# Altium PCB PCB2.PcbDoc
Units mm, origin at the board's own origin, x right, y up, seen from the top; angles counter-clockwise.
Board outline 152.4 x 101.6 mm, 2 copper layers (Top Layer, Bottom Layer); 59 components, 44 nets, 191 pads, 9 vias.
Unrouted connection lines stored in the file: 1.
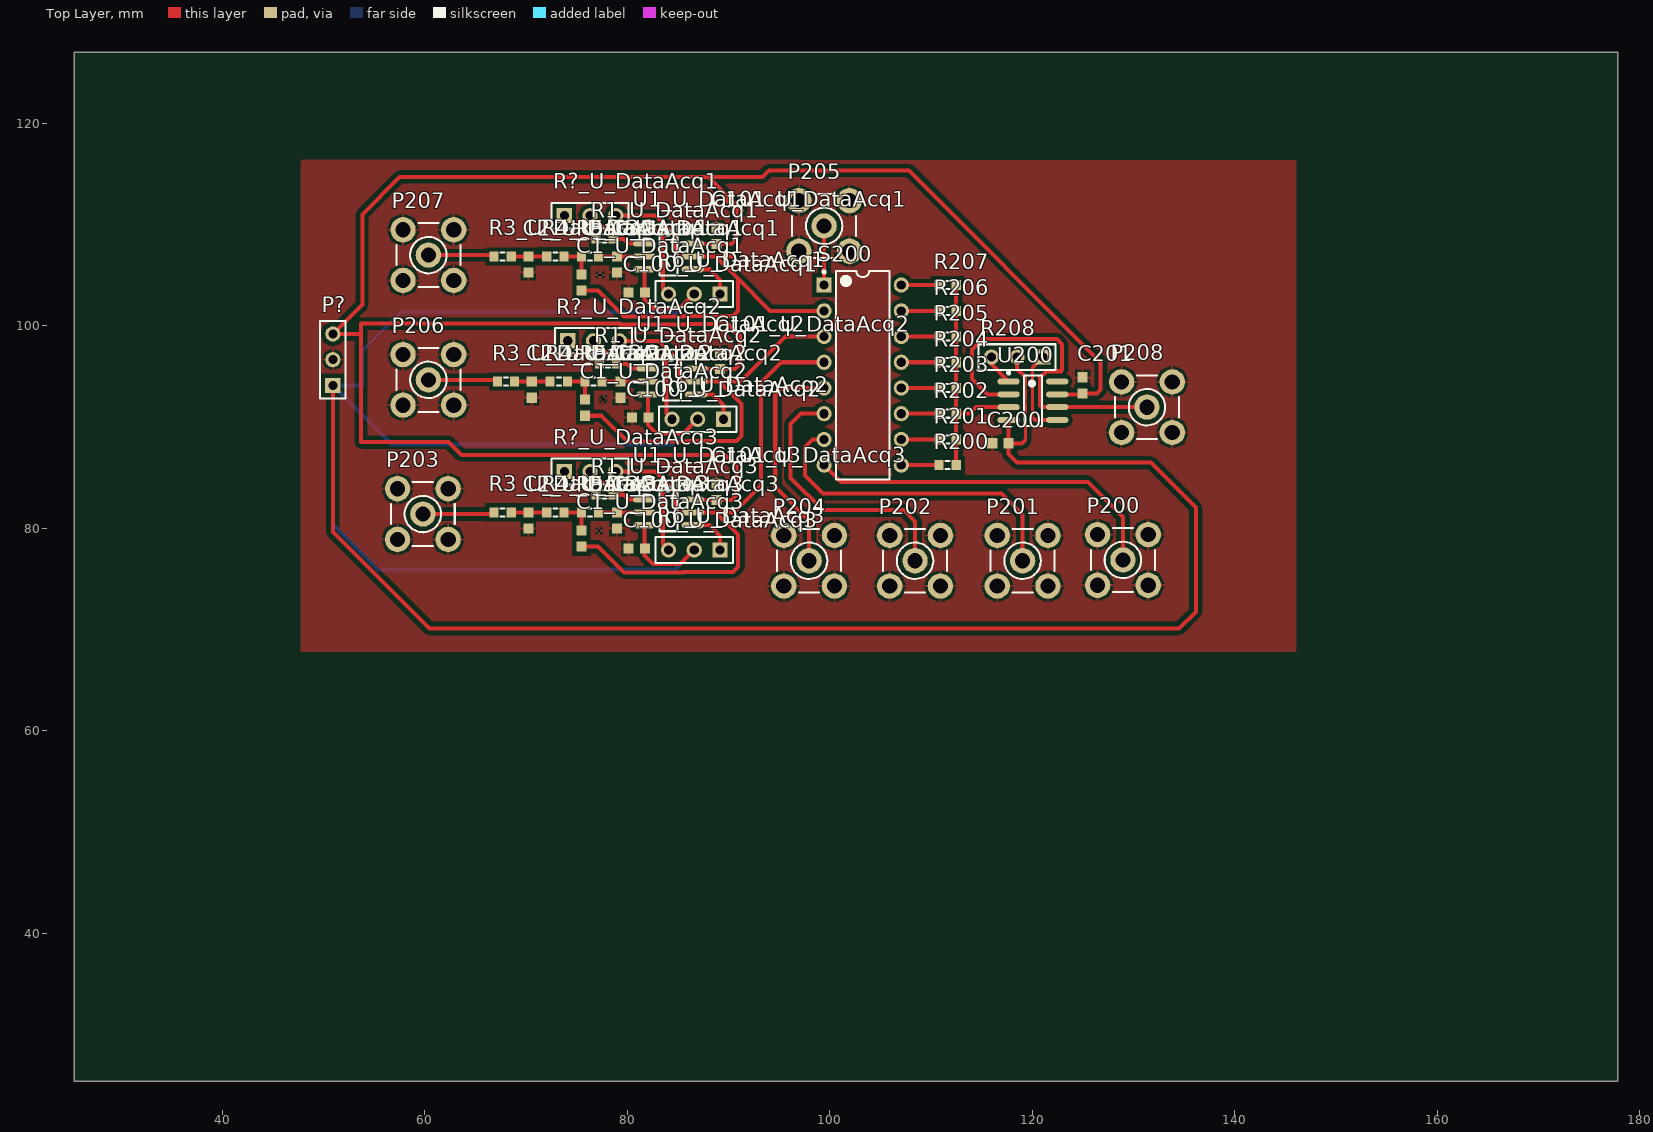
[diagram p0: Top Layer view]
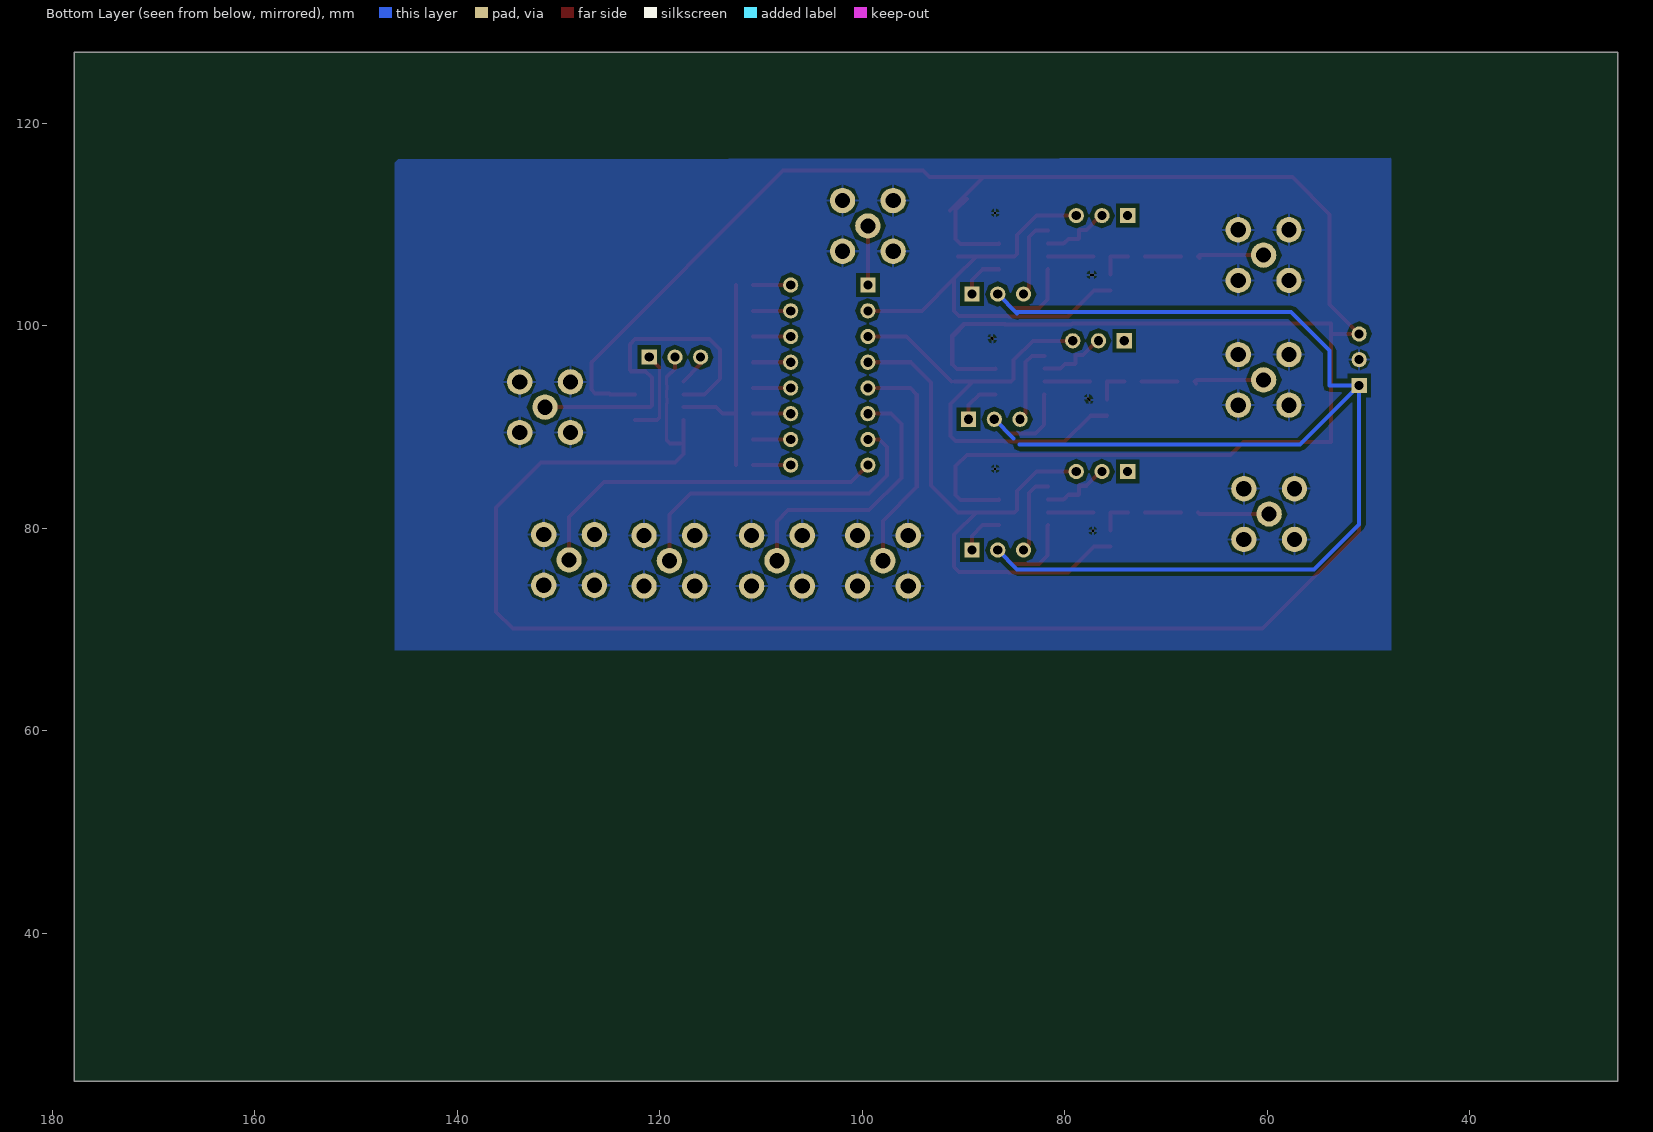
[diagram p1: Bottom Layer view, seen from below]

## Layer stack, top to bottom
Top Solder: solder mask 0.0102, Solder Resist, Dk 3.5
Top Layer: signal copper 0.0356
Dielectric 1: dielectric 0.32, FR-4, Dk 4.8
Bottom Layer: signal copper 0.0356
Bottom Solder: solder mask 0.0102, Solder Resist, Dk 3.5

## Board outline
25.4,25.4 177.8,25.4 177.8,127 25.4,127

## Design rules (kind name [scope] priority, off if disabled: settings)
Clearance [All] p1: gap=0.4 ignorepadtopadclearanceinfootprint=FALSE
PolygonConnect [All] p1: connectstyle=Relief reliefconductorwidth=0.254 reliefentries=4 polygonreliefangle="90 Angle" airgapwidth=0.254
RoomDefinition U_DataAcq1 [InComponentClass('U_DataAcq1')] p1: confinementstyle=ConfineIn formatcopy=TRUE lockcomponents=FALSE outline 65.278,100.076 92.075,100.076 92.075,112.903 65.278,112.903
RoomDefinition U_DataAcq3 [InComponentClass('U_DataAcq3')] p2: confinementstyle=ConfineIn formatcopy=TRUE lockcomponents=FALSE outline 65.278,74.803 92.075,74.803 92.075,87.63 65.278,87.63
RoomDefinition U_DataAcq2 [InComponentClass('U_DataAcq2')] p3: confinementstyle=ConfineIn formatcopy=TRUE lockcomponents=FALSE outline 65.62,87.719 92.417,87.719 92.417,100.546 65.62,100.546
RoutingVias [All] p1: holewidth=0.711 width=1.27 viastyle="Through Hole" minholewidth=0.711 minwidth=1.27 maxholewidth=0.711 maxwidth=1.27
SolderMaskExpansion [All] p1: expansion=0.102
Width [All] p1: maxlimit=0.6 minlimit=0.3 preferedwidth=0.4
30 further rules are at their usual default settings.

## Classes and differential pairs
channel class LPF: U_DataAcq1 U_DataAcq2 U_DataAcq3
net class out[1..3]: out1 out2 out3
net class in[1..3]: in1 in2 in3
component class WholeAdder: C200 C201 P200 P201 P202 P203 P204 P205 P206 P207 P208 P? R200 R201 R202 R203 R204 R205 R206 R207 R208 S200 U200
component class U_DataAcq3: C1_U_DataAcq3 C2_U_DataAcq3 C3_U_DataAcq3 C100_U_DataAcq3 C101_U_DataAcq3 R1_U_DataAcq3 R3_U_DataAcq3 R4_U_DataAcq3 R5_U_DataAcq3 R6_U_DataAcq3 R?_U_DataAcq3 U1_U_DataAcq3
component class U_DataAcq2: C1_U_DataAcq2 C2_U_DataAcq2 C3_U_DataAcq2 C100_U_DataAcq2 C101_U_DataAcq2 R1_U_DataAcq2 R3_U_DataAcq2 R4_U_DataAcq2 R5_U_DataAcq2 R6_U_DataAcq2 R?_U_DataAcq2 U1_U_DataAcq2
component class U_DataAcq1: C1_U_DataAcq1 C2_U_DataAcq1 C3_U_DataAcq1 C100_U_DataAcq1 C101_U_DataAcq1 R1_U_DataAcq1 R3_U_DataAcq1 R4_U_DataAcq1 R5_U_DataAcq1 R6_U_DataAcq1 R?_U_DataAcq1 U1_U_DataAcq1

## Components (designator, comment, footprint, x,y, rotation, side; value= is the part's Value field where it differs from the comment)
C1_U_DataAcq1 "Cap" CAPC1608N 75.477,104.267 r90 top value=100pF (schematic designator C1)
C1_U_DataAcq2 "Cap" CAPC1608N 75.819,91.91 r90 top value=100pF (schematic designator C1)
C1_U_DataAcq3 "Cap" CAPC1608N 75.477,78.994 r90 top value=100pF (schematic designator C1)
C2_U_DataAcq1 "Cap" CAPC1608N 70.231,106.045 r90 top value=100pF (schematic designator C2)
C2_U_DataAcq2 "Cap" CAPC1608N 70.573,93.688 r90 top value=100pF (schematic designator C2)
C2_U_DataAcq3 "Cap" CAPC1608N 70.231,80.772 r90 top value=100pF (schematic designator C2)
C3_U_DataAcq1 "Cap" CAPC1608N 78.994,106.045 r90 top value=100pF (schematic designator C3)
C3_U_DataAcq2 "Cap" CAPC1608N 79.336,93.688 r90 top value=100pF (schematic designator C3)
C3_U_DataAcq3 "Cap" CAPC1608N 78.994,80.772 r90 top value=100pF (schematic designator C3)
C100_U_DataAcq1 "Cap" CAPC1608N 80.938,103.289 r0 top value=100pF (schematic designator C100)
C100_U_DataAcq2 "Cap" CAPC1608N 81.28,90.932 r0 top value=100pF (schematic designator C100)
C100_U_DataAcq3 "Cap" CAPC1608N 80.938,78.016 r0 top value=100pF (schematic designator C100)
C101_U_DataAcq1 "Cap" CAPC1608N 88.812,108.877 r270 top value=100pF (schematic designator C101)
C101_U_DataAcq2 "Cap" CAPC1608N 89.154,96.52 r270 top value=100pF (schematic designator C101)
C101_U_DataAcq3 "Cap" CAPC1608N 88.812,83.604 r270 top value=100pF (schematic designator C101)
C200 "Cap" CAPC1608N 116.84,88.392 r0 top value=100pF
C201 "Cap" CAPC1608N 124.968,94.107 r270 top value=100pF
P200 "SMB" SMB_V-RJ45 128.945,76.875 r0 top
P201 "SMB" SMB_V-RJ45 119.039,76.795 r0 top
P202 "SMB" SMB_V-RJ45 108.418,76.795 r0 top
P203 "SMB" SMB_V-RJ45 59.817,81.407 r0 top
P204 "SMB" SMB_V-RJ45 97.957,76.795 r0 top
P205 "SMB" SMB_V-RJ45 99.441,109.855 r0 top
P206 "SMB" SMB_V-RJ45 60.365,94.655 r0 top
P207 "SMB" SMB_V-RJ45 60.365,106.974 r0 top
P208 "SMB" SMB_V-RJ45 131.318,91.959 r0 top
P? "Header 3" HDR1X3 50.927,94.107 r90 top
R1_U_DataAcq1 "Res1" RESC1608N 77.763,108.623 r0 top value=1K (schematic designator R1)
R1_U_DataAcq2 "Res1" RESC1608N 78.105,96.266 r0 top value=1K (schematic designator R1)
R1_U_DataAcq3 "Res1" RESC1608N 77.763,83.35 r0 top value=1K (schematic designator R1)
R3_U_DataAcq1 "Res1" RESC1608N 67.691,106.845 r0 top value=1K (schematic designator R3)
R3_U_DataAcq2 "Res1" RESC1608N 68.033,94.488 r0 top value=1K (schematic designator R3)
R3_U_DataAcq3 "Res1" RESC1608N 67.691,81.572 r0 top value=1K (schematic designator R3)
R4_U_DataAcq1 "Res1" RESC1608N 72.898,106.845 r0 top value=1K (schematic designator R4)
R4_U_DataAcq2 "Res1" RESC1608N 73.24,94.488 r0 top value=1K (schematic designator R4)
R4_U_DataAcq3 "Res1" RESC1608N 72.898,81.572 r0 top value=1K (schematic designator R4)
R5_U_DataAcq1 "Res1" RESC1608N 76.327,106.845 r0 top value=1K (schematic designator R5)
R5_U_DataAcq2 "Res1" RESC1608N 76.669,94.488 r0 top value=1K (schematic designator R5)
R5_U_DataAcq3 "Res1" RESC1608N 76.327,81.572 r0 top value=1K (schematic designator R5)
R6_U_DataAcq1 "Res Tap" HDR1X3 89.154,103.124 r180 top value=1K (schematic designator R6)
R6_U_DataAcq2 "Res Tap" HDR1X3 89.496,90.767 r180 top value=1K (schematic designator R6)
R6_U_DataAcq3 "Res Tap" HDR1X3 89.154,77.851 r180 top value=1K (schematic designator R6)
R200 "Res1" RESC1608N 111.633,86.233 r0 top value=1K
R201 "Res1" RESC1608N 111.633,88.773 r0 top value=1K
R202 "Res1" RESC1608N 111.633,91.313 r0 top value=1K
R203 "Res1" RESC1608N 111.633,93.853 r0 top value=1K
R204 "Res1" RESC1608N 111.633,96.393 r0 top value=1K
R205 "Res1" RESC1608N 111.633,98.933 r0 top value=1K
R206 "Res1" RESC1608N 111.633,101.473 r0 top value=1K
R207 "Res1" RESC1608N 111.633,104.013 r0 top value=1K
R208 "Res Tap" HDR1X3 121.031,96.901 r180 top value=1K
R?_U_DataAcq1 "Res Tap" HDR1X3 73.787,110.871 r0 top value=1K (schematic designator R?)
R?_U_DataAcq2 "Res Tap" HDR1X3 74.129,98.514 r0 top value=1K (schematic designator R?)
R?_U_DataAcq3 "Res Tap" HDR1X3 73.787,85.598 r0 top value=1K (schematic designator R?)
S200 "SW DIP-8" DIP-16 103.251,95.123 r0 top
U1_U_DataAcq1 "TL081BCD" TI-D8_N 84.074,107.48 r0 top (schematic designator U1)
U1_U_DataAcq2 "TL081BCD" TI-D8_N 84.416,95.123 r0 top (schematic designator U1)
U1_U_DataAcq3 "TL081BCD" TI-D8_N 84.074,82.207 r0 top (schematic designator U1)
U200 "TL081BCD" TI-D8_N 120.055,92.594 r0 top

## Footprints (in the part's own frame and the unit in brackets; to place one, negate y for a bottom-side part, rotate by r counter-clockwise, add the part's x,y. Pads: shape width x height; smd on the part's side, far side on the other; paste and mask are expansions set on the pad)
CAPC1608N [mm] "Chip Capacitor, Body 1.6x0.8mm, IPC Medium Density"
  rect 1x1 smd: 1(-0.8,0) 2(0.8,0)
  body extent -0.87,-0.48 0.87,0.48, height 0.85
DIP-16 [mm] "DIP; 16 Leads; Row Spacing 7.62 mm; Pitch 2.54 mm"
  rect 1.5x1.5 hole 0.9: 1(-3.81,8.89)
  round 1.5 hole 0.9: 2(-3.81,6.35) 3(-3.81,3.81) 4(-3.81,1.27) 5(-3.81,-1.27) 6(-3.81,-3.81) 7(-3.81,-6.35) 8(-3.81,-8.89) 9(3.81,-8.89) 10(3.81,-6.35) 11(3.81,-3.81) 12(3.81,-1.27) 13(3.81,1.27) 14(3.81,3.81) 15(3.81,6.35) 16(3.81,8.89)
  silkscreen extent -3.93,-10.3 2.65,10.31, body extent -3.6,-10.28 3.6,10.28, height 5.08
HDR1X3 [mm] "Connector; Header; 3 Position"
  rect 1.5x1.5 hole 0.9: 1(0,0)
  round 1.5 hole 0.9: 2(2.54,0) 3(5.08,0)
  silkscreen extent -1.27,-1.27 6.35,1.27
RESC1608N [mm] "Chip Resistor, Body 1.6x0.8mm, IPC Medium Density"
  rect 0.9x1 smd: 1(-0.85,0) 2(0.85,0)
  silkscreen extent -0.2,-0.4 0.2,0.4, body extent -0.85,-0.48 0.85,0.48, height 0.6
SMB_V-RJ45 [mm] "Connector; SMB Straight"
  round 2.5 hole 1.5: 1(0,0) 2(-2.5,-2.5) 2(-2.5,2.5) 2(2.5,-2.5) 2(2.5,2.5)
  silkscreen extent -3.15,-3.15 3.15,3.15
TI-D8_N [mm] "SOIC, 8-Leads, Body 4.9x3.9mm, Pitch 1.27mm, IPC Medium Density"
  oval 2.2x0.6 smd: 1(-2.4,1.905) 2(-2.4,0.635) 3(-2.4,-0.635) 4(-2.4,-1.905) 5(2.4,-1.905) 6(2.4,-0.635) 7(2.4,0.635) 8(2.4,1.905)
  silkscreen extent -2.52,-2.5 0.9,2.88, body extent -2,-2.5 2,2.5, height 1.75

## Part data
C1_U_DataAcq1 C1_U_DataAcq2 C1_U_DataAcq3 C2_U_DataAcq1 C2_U_DataAcq2 C2_U_DataAcq3 C3_U_DataAcq1 C3_U_DataAcq2 C3_U_DataAcq3 C100_U_DataAcq1 C100_U_DataAcq2 C100_U_DataAcq3 C101_U_DataAcq1 C101_U_DataAcq2 C101_U_DataAcq3 C200 C201: "Capacitor", LatestRevisionDate=17-Jul-2002, LatestRevisionNote="Re-released for DXP Platform.", PackageDescription="Radial Cap, Thru-Hole; 2 Leads; 0.3 in Pin Spacing", PackageReference=RAD-0.3, Published=8-Jun-2000, Publisher="Altium Limited"
P200 P201 P202 P203 P204 P205 P206 P207 P208: "SMB Straight Connector", LatestRevisionDate=17-Jul-2002, LatestRevisionNote="Re-released for DXP Platform.", Publisher="Altium Limited"
P?: "Header, 3-Pin", LatestRevisionDate=17-Jul-2002, LatestRevisionNote="Re-released for DXP Platform.", Publisher="Altium Limited"
R1_U_DataAcq1 R1_U_DataAcq2 R1_U_DataAcq3 R3_U_DataAcq1 R3_U_DataAcq2 R3_U_DataAcq3 R4_U_DataAcq1 R4_U_DataAcq2 R4_U_DataAcq3 R5_U_DataAcq1 R5_U_DataAcq2 R5_U_DataAcq3 R200 R201 R202 R203 R204 R205 R206 R207: "Resistor", LatestRevisionDate=17-Jul-2002, LatestRevisionNote="Re-released for DXP Platform.", PackageDescription="Axial Device, Thru-Hole; 2 Leads; 0.3 in Pin Spacing", PackageReference=AXIAL-0.3, Published=8-Jun-2000, Publisher="Altium Limited"
R6_U_DataAcq1 R6_U_DataAcq2 R6_U_DataAcq3 R208 R?_U_DataAcq1 R?_U_DataAcq2 R?_U_DataAcq3: "Tapped Resistor", LatestRevisionDate=17-Jul-2002, LatestRevisionNote="Re-released for DXP Platform.", PackageDescription="Variable Resistor, Thru-Hole; 3 Leads", PackageReference=VR3, Published=24-Mar-1999, Publisher="Altium Limited", Set Position=0.5, Sim Note="Enter the Resistance value and the set point into parameter fields."
S200: "DIP Switch, 8 Position, SPST", LatestRevisionDate=17-Jul-2002, LatestRevisionNote="Re-released for DXP Platform.", PackageDescription="DIP Switch; 16 Leads", PackageReference=DIP_SW_8WAY_SMD, Published=24-Mar-1999, Publisher="Altium Limited"
U1_U_DataAcq1 U1_U_DataAcq2 U1_U_DataAcq3 U200: "JFET-Input Operational Amplifier, 7 to 36 V, 0 to 70 degC, 8-pin SOIC (D8), Green (RoHS & no Sb/Br)", Manufacturer="Texas Instruments", Rating=Catalog, Supplier Part Number 1=296-34259-5-ND, Total Supply Voltage(Max)(+5V is 5, +/-5V is 10)=36, Total Supply Voltage(Min)(+5V is 5, +/-5V is 10)=7, CMRR(Min)(dB)=75, Code_JEDEC=MS-012, ComponentLink1Description="Manufacturer URL", ComponentLink1URL=http://www.ti.com/, ComponentLink2Description=Datasheet, ComponentLink2URL=http://www.ti.com/lit/ds/symlink/tl081b.pdf, ComponentLink3Description="Package Specification", ComponentLink3URL=http://www.ti.com/litv/pdf/msoi002j, DatasheetVersion=SLOS081G, Eco-Plan="Green (RoHS & no Sb/Br)", GBW(Typ)(MHz)=3, IIB(Max)(pA)=200, Iq per channel(Max)(mA)=2.8, Mounting Technology="Surface Mount", Number of Channels=1, Offset Drift(Typ)(uV/C)=18, PackageDescription="8-Pin Plastic Small Outline, Body 4.9 x 3.9 mm, Pitch 1.27 mm", PackageReference=D8, PackageVersion="4040047-3/M, 06/2011", PartNumber=TL081BCD, Slew Rate(Typ)(V/us)=13, Sub Family="General Purpose Amplifier, High Supply Voltage Amplifier (>=30V)", Supplier 1=Digi-Key, Supplier 2=Farnell, Supplier 3=Newark, Supplier 4=Newark, Supplier 5=Mouser, Supplier Part Number 2=1459710, Supplier Part Number 3=62M0593, Supplier Part Number 4=76C9117, Supplier Part Number 5=595-TL081BCD, Vio (25C)(Max)(mV)=3, Vn at 1kHz(Typ)(nV/rtHz)=18

## Via types
v1: diameter 0.3, hole 0.3, Top Layer to Bottom Layer, 9 vias

## Nets (pads, with @x,y where several pads share a name; then routed paths per layer and width w, separated by ;. In a path a pad name is that pad's centre, name@x,y a point inside that pad or via, vN(x,y) a via of type N, cw(c..) or ccw(c..) an arc to the next point about the centre after c; other vN are vias at no path point)
GND: C2_U_DataAcq1.1 C2_U_DataAcq2.1 C2_U_DataAcq3.1 C3_U_DataAcq1.1 C3_U_DataAcq2.1 C3_U_DataAcq3.1 C100_U_DataAcq1.1 C100_U_DataAcq2.1 C100_U_DataAcq3.1 C101_U_DataAcq1.1 C101_U_DataAcq2.1 C101_U_DataAcq3.1 C200.1 C201.1 P200.2 P201.2 P202.2 P203.2 P204.2 P205.2 P206.2 P207.2 P208.2 P?.2 R1_U_DataAcq1.1 R1_U_DataAcq2.1 R1_U_DataAcq3.1
  other v1: 77.228,79.756 86.868,85.876 77.57,92.672 77.688,92.837 87.122,98.679 87.21,98.792 77.228,105.029 77.423,105.029 86.868,111.149
in1: P207.1 R3_U_DataAcq1.1 | length 6.6
  Top Layer w0.4: P207.1 R3_U_DataAcq1.1@66.712,106.974 ; R3_U_DataAcq1.1@66.676,106.68 R3_U_DataAcq1.1
in2: P206.1 R3_U_DataAcq2.1 | length 6.9
  Top Layer w0.4: P206.1 R3_U_DataAcq2.1@67.016,94.655 ; R3_U_DataAcq2.1@67.018,94.323 R3_U_DataAcq2.1
in3: P203.1 R3_U_DataAcq3.1 | length 7.1
  Top Layer w0.4: P203.1 66.676,81.407 R3_U_DataAcq3.1
N5: C100_U_DataAcq1.2 C100_U_DataAcq2.2 C100_U_DataAcq3.2 C200.2 P?.1 R6_U_DataAcq1.2 R6_U_DataAcq2.2 R6_U_DataAcq3.2 R208.2 U1_U_DataAcq1.4 U1_U_DataAcq2.4 U1_U_DataAcq3.4 U200.4 | length 307.9
  Top Layer w0.3: 119.253,88.646 119.305,88.698 119.305,92.311 119.253,92.363 119.253,92.825 119.305,92.877 119.305,93.581 119.253,93.633 119.253,94.095 119.305,94.147 119.305,94.922 119.253,94.974
  Top Layer w0.4: P?.1 50.927,79.629 60.452,70.104 134.493,70.104 136.144,71.755 136.144,82.042 131.699,86.487 118.491,86.487 117.64,87.338 C200.2 ; U1_U_DataAcq3.4 81.699,80.277 81.699,77.305 82.55,76.454 85.217,76.454 R6_U_DataAcq3.2 ; U1_U_DataAcq1.4 81.699,105.55 81.699,102.578 82.55,101.727 85.217,101.727 R6_U_DataAcq1.2 ; U1_U_DataAcq2.4 82.041,93.193 82.041,90.221 82.892,89.37 85.559,89.37 R6_U_DataAcq2.2 ; U200.4 117.655,88.407 C200.2 ; R208.2 118.491,95.736 119.253,94.974 ; 119.253,88.646 118.999,88.392 C200.2
  Bottom Layer w0.4: 84.454,88.265 56.769,88.265 P?.1 ; 84.709,101.219 R6_U_DataAcq1.2 ; 84.836,101.346 57.658,101.346 53.848,97.536 53.848,94.107 P?.1 ; 85.051,88.862 R6_U_DataAcq2.2 ; R6_U_DataAcq3.2 84.709,75.946 55.372,75.946 50.927,80.391 P?.1
NetC1_U_DataAcq1_2: C1_U_DataAcq1.2 R4_U_DataAcq1.2 R5_U_DataAcq1.1 | length 3.5
  Top Layer w0.4: R4_U_DataAcq1.2 R5_U_DataAcq1.1 C1_U_DataAcq1.2
NetC1_U_DataAcq2_2: C1_U_DataAcq2.2 R4_U_DataAcq2.2 R5_U_DataAcq2.1 | length 3.5
  Top Layer w0.4: R4_U_DataAcq2.2 R5_U_DataAcq2.1 C1_U_DataAcq2.2
NetC1_U_DataAcq3_2: C1_U_DataAcq3.2 R4_U_DataAcq3.2 R5_U_DataAcq3.1 | length 3.5
  Top Layer w0.4: R4_U_DataAcq3.2 R5_U_DataAcq3.1 C1_U_DataAcq3.2
NetC2_U_DataAcq1_2: C2_U_DataAcq1.2 R3_U_DataAcq1.2 R4_U_DataAcq1.1 | length 3.6
  Top Layer w0.4: R3_U_DataAcq1.2 C2_U_DataAcq1.2 R4_U_DataAcq1.1 R4_U_DataAcq1.1@72.098,106.845
NetC2_U_DataAcq2_2: C2_U_DataAcq2.2 R3_U_DataAcq2.2 R4_U_DataAcq2.1 | length 3.6
  Top Layer w0.4: R3_U_DataAcq2.2 C2_U_DataAcq2.2 R4_U_DataAcq2.1 R4_U_DataAcq2.1@72.44,94.488
NetC2_U_DataAcq3_2: C2_U_DataAcq3.2 R3_U_DataAcq3.2 R4_U_DataAcq3.1 | length 3.6
  Top Layer w0.4: R3_U_DataAcq3.2 C2_U_DataAcq3.2 R4_U_DataAcq3.1 R4_U_DataAcq3.1@72.098,81.572
NetC3_U_DataAcq1_2: C3_U_DataAcq1.2 R5_U_DataAcq1.2 U1_U_DataAcq1.3 | length 4.5
  Top Layer w0.4: R5_U_DataAcq1.2 C3_U_DataAcq1.2 U1_U_DataAcq1.3
NetC3_U_DataAcq2_2: C3_U_DataAcq2.2 R5_U_DataAcq2.2 U1_U_DataAcq2.3 | length 4.5
  Top Layer w0.4: R5_U_DataAcq2.2 C3_U_DataAcq2.2 U1_U_DataAcq2.3
NetC3_U_DataAcq3_2: C3_U_DataAcq3.2 R5_U_DataAcq3.2 U1_U_DataAcq3.3 | length 4.5
  Top Layer w0.4: R5_U_DataAcq3.2 C3_U_DataAcq3.2 U1_U_DataAcq3.3
NetP200_1: P200.1 S200.8 | length 35.9
  Top Layer w0.4: S200.8 101.092,84.582 125.476,84.582 128.945,81.113 P200.1
NetP201_1: P201.1 S200.7 | length 32.7
  Top Layer w0.4: S200.7 98.298,88.773 97.536,88.011 97.536,85.217 99.314,83.439 116.967,83.439 119.039,81.367 P201.1
NetP202_1: P202.1 S200.6 | length 27
  Top Layer w0.4: S200.6 97.141,91.313 96.139,90.311 96.139,84.963 99.314,81.788 107.315,81.788 108.418,80.685 P202.1
NetP204_1: P204.1 S200.5 | length 22.9
  Top Layer w0.4: P204.1 97.957,80.732 94.615,84.074 94.615,93.218 95.25,93.853 S200.5
NetP205_1: P205.1 S200.1 | length 5.8
  Top Layer w0.4: S200.1 P205.1
NetP208_1: P208.1 U200.2 U200.6 | length 35.1
  Top Layer w0.4: U200.2 115.581,93.229 114.046,94.764 114.046,97.663 115.062,98.679 122.428,98.679 122.936,98.171 122.936,95.631 122.809,95.504 121.387,95.504 120.755,94.872 120.755,92.119 120.915,91.959 U200.6 P208.1
NetR1_U_DataAcq1_2: R1_U_DataAcq1.2 R?_U_DataAcq1.2 U1_U_DataAcq1.2 | length 6.9
  Top Layer w0.4: R?_U_DataAcq1.2 76.464,110.871 77.861,109.474 78.575,109.474 78.613,109.436 R1_U_DataAcq1.2 ; R1_U_DataAcq1.2@78.662,108.585 79.629,108.585 80.099,108.115 U1_U_DataAcq1.2
NetR1_U_DataAcq2_2: R1_U_DataAcq2.2 R?_U_DataAcq2.2 U1_U_DataAcq2.2 | length 6.9
  Top Layer w0.4: R?_U_DataAcq2.2 76.806,98.514 78.203,97.117 78.917,97.117 78.955,97.079 R1_U_DataAcq2.2 ; R1_U_DataAcq2.2@79.004,96.228 79.971,96.228 80.441,95.758 U1_U_DataAcq2.2
NetR1_U_DataAcq3_2: R1_U_DataAcq3.2 R?_U_DataAcq3.2 U1_U_DataAcq3.2 | length 6.9
  Top Layer w0.4: R?_U_DataAcq3.2 76.464,85.598 77.861,84.201 78.575,84.201 78.613,84.163 R1_U_DataAcq3.2 ; R1_U_DataAcq3.2@78.662,83.312 79.629,83.312 80.099,82.842 U1_U_DataAcq3.2
NetR6_U_DataAcq1_1: R6_U_DataAcq1.1 U1_U_DataAcq1.5 | length 4.5
  Top Layer w0.4: U1_U_DataAcq1.5 88.1,105.575 89.154,104.521 R6_U_DataAcq1.1
NetR6_U_DataAcq1_2: R6_U_DataAcq1.3 U1_U_DataAcq1.1 | length 8
  Top Layer w0.4: U1_U_DataAcq1.1 82.893,109.385 83.514,108.764 83.514,103.684 R6_U_DataAcq1.3
NetR6_U_DataAcq2_1: R6_U_DataAcq2.1 U1_U_DataAcq2.5 | length 4.5
  Top Layer w0.4: U1_U_DataAcq2.5 88.442,93.218 89.496,92.164 R6_U_DataAcq2.1
NetR6_U_DataAcq2_2: R6_U_DataAcq2.3 U1_U_DataAcq2.1 | length 8
  Top Layer w0.4: U1_U_DataAcq2.1 83.235,97.028 83.856,96.407 83.856,91.327 R6_U_DataAcq2.3
NetR6_U_DataAcq3_1: R6_U_DataAcq3.1 U1_U_DataAcq3.5 | length 4.5
  Top Layer w0.4: U1_U_DataAcq3.5 88.1,80.302 89.154,79.248 R6_U_DataAcq3.1
NetR6_U_DataAcq3_2: R6_U_DataAcq3.3 U1_U_DataAcq3.1 | length 8
  Top Layer w0.4: U1_U_DataAcq3.1 82.893,84.112 83.514,83.491 83.514,78.411 R6_U_DataAcq3.3
NetR200_1: R200.1 S200.9 | length 3.7
  Top Layer w0.4: S200.9 R200.1
NetR200_2: R200.2 R201.2 R202.2 R203.2 R204.2 R205.2 R206.2 R207.2 U200.3 | length 23.2
  Top Layer w0.4: R200.2 R201.2 R202.2 ; R207.2 R206.2 R205.2 R204.2 R202.2 ; U200.3 114.427,91.959 113.781,91.313 R202.2
NetR201_1: R201.1 S200.10 | length 3.7
  Top Layer w0.4: S200.10 R201.1
NetR202_1: R202.1 S200.11 | length 3.7
  Top Layer w0.4: S200.11 R202.1
NetR203_1: R203.1 S200.12 | length 3.7
  Top Layer w0.4: S200.12 R203.1
NetR204_1: R204.1 S200.13 | length 3.7
  Top Layer w0.4: S200.13 R204.1
NetR205_1: R205.1 S200.14 | length 3.7
  Top Layer w0.4: S200.14 R205.1
NetR206_1: R206.1 S200.15 | length 3.7
  Top Layer w0.4: S200.15 R206.1
NetR207_1: R207.1 S200.16 | length 3.7
  Top Layer w0.4: S200.16 R207.1
NetR208_1: R208.1 U200.5 | length 8.9
  Top Layer w0.3: 120.055,90.905 120.005,90.955 120.005,95.875 120.055,95.925
  Top Layer w0.4: 120.055,90.905 120.271,90.689 U200.5 ; 120.055,95.925 R208.1
NetR208_2: R208.3 U200.1 | length 3.1
  Top Layer w0.4: R208.3 115.951,96.203 U200.1
out1: C1_U_DataAcq1.1 R?_U_DataAcq1.3 S200.2 U1_U_DataAcq1.6 | length 47.3
  Top Layer w0.4: C1_U_DataAcq1.1 77.127,103.467 79.667,100.927 85.548,100.927 85.586,100.965 90.424,100.965 90.932,101.473 90.932,104.648 ; R?_U_DataAcq1.3 82.804,110.871 84.709,108.966 84.709,107.099 84.963,106.845 U1_U_DataAcq1.6 88.735,106.845 ; 90.551,106.845 88.735,106.845 ; S200.2 94.107,101.473 90.932,104.648 ; 88.735,106.845 90.932,104.648
out2: C1_U_DataAcq2.1 R?_U_DataAcq2.3 S200.3 U1_U_DataAcq2.6 | length 47.6
  Top Layer w0.4: C1_U_DataAcq2.1 77.469,91.11 80.009,88.57 85.89,88.57 85.928,88.608 90.766,88.608 91.274,89.116 91.274,92.291 89.077,94.488 ; R?_U_DataAcq2.3 83.146,98.514 85.051,96.609 85.051,94.742 85.305,94.488 U1_U_DataAcq2.6 89.077,94.488 ; 90.893,94.488 89.077,94.488 ; 91.186,94.488 95.631,98.933 S200.3
out3: C1_U_DataAcq3.1 R?_U_DataAcq3.3 S200.4 U1_U_DataAcq3.6 | length 58.4
  Top Layer w0.4: C1_U_DataAcq3.1 77.127,78.194 79.667,75.654 85.548,75.654 85.586,75.692 90.424,75.692 90.932,76.2 90.932,79.375 88.735,81.572 ; R?_U_DataAcq3.3 82.804,85.598 84.709,83.693 84.709,81.826 84.963,81.572 U1_U_DataAcq3.6 88.735,81.572 ; S200.4 95.199,96.393 93.218,94.412 93.218,84.239 90.551,81.572 88.735,81.572
P25: C101_U_DataAcq1.2 C101_U_DataAcq2.2 C101_U_DataAcq3.2 C201.2 P?.3 U1_U_DataAcq1.7 U1_U_DataAcq2.7 U1_U_DataAcq3.7 U200.7 | length 222.9
  Top Layer w0.4: U1_U_DataAcq3.7 86.512,82.804 90.297,82.804 90.766,83.273 90.766,86.145 89.662,87.249 63.627,87.249 62.357,88.519 53.721,88.519 53.721,99.187 ; U1_U_DataAcq1.7 86.512,108.077 90.297,108.077 90.766,108.546 90.766,111.418 89.662,112.522 ; U1_U_DataAcq2.7 86.854,95.72 90.639,95.72 91.108,96.189 91.108,99.061 90.004,100.165 ; 90.932,99.06 89.827,100.165 85.918,100.165 85.88,100.127 79.336,100.127 79.26,100.203 53.721,100.203 53.721,99.187 ; 91.313,111.379 88.011,114.681 ; U200.7 124.89,93.229 C201.2 126.365,93.307 126.746,93.688 126.746,96.393 107.823,115.316 93.98,115.316 93.345,114.681 88.011,114.681 ; 53.721,99.187 P?.3 53.848,102.108 53.848,110.998 57.531,114.681 88.011,114.681
pads on no net: R?_U_DataAcq1.1 R?_U_DataAcq2.1 R?_U_DataAcq3.1 U1_U_DataAcq1.8 U1_U_DataAcq2.8 U1_U_DataAcq3.8 U200.8

## Polygon pours and split planes (outlines as drawn)
GND on Top Layer "GND" (solid, remove dead copper, pour order 6): 48.006,116.459 47.752,116.205 47.752,67.818 145.923,67.818 146.05,67.945 146.05,116.332
GND on Bottom Layer "GND" (solid, remove dead copper, pour order 8): 47.752,116.586 47.752,67.945 146.177,67.945 146.177,116.078 145.796,116.459